# Altium PCB IR.PcbDoc
Units mm, origin at the board's own origin, x right, y up, seen from the top; angles counter-clockwise.
Board outline 31.95 x 23.94 mm, 2 copper layers (Top Layer, Bottom Layer); 11 components, 7 nets, 22 pads, 48 vias.
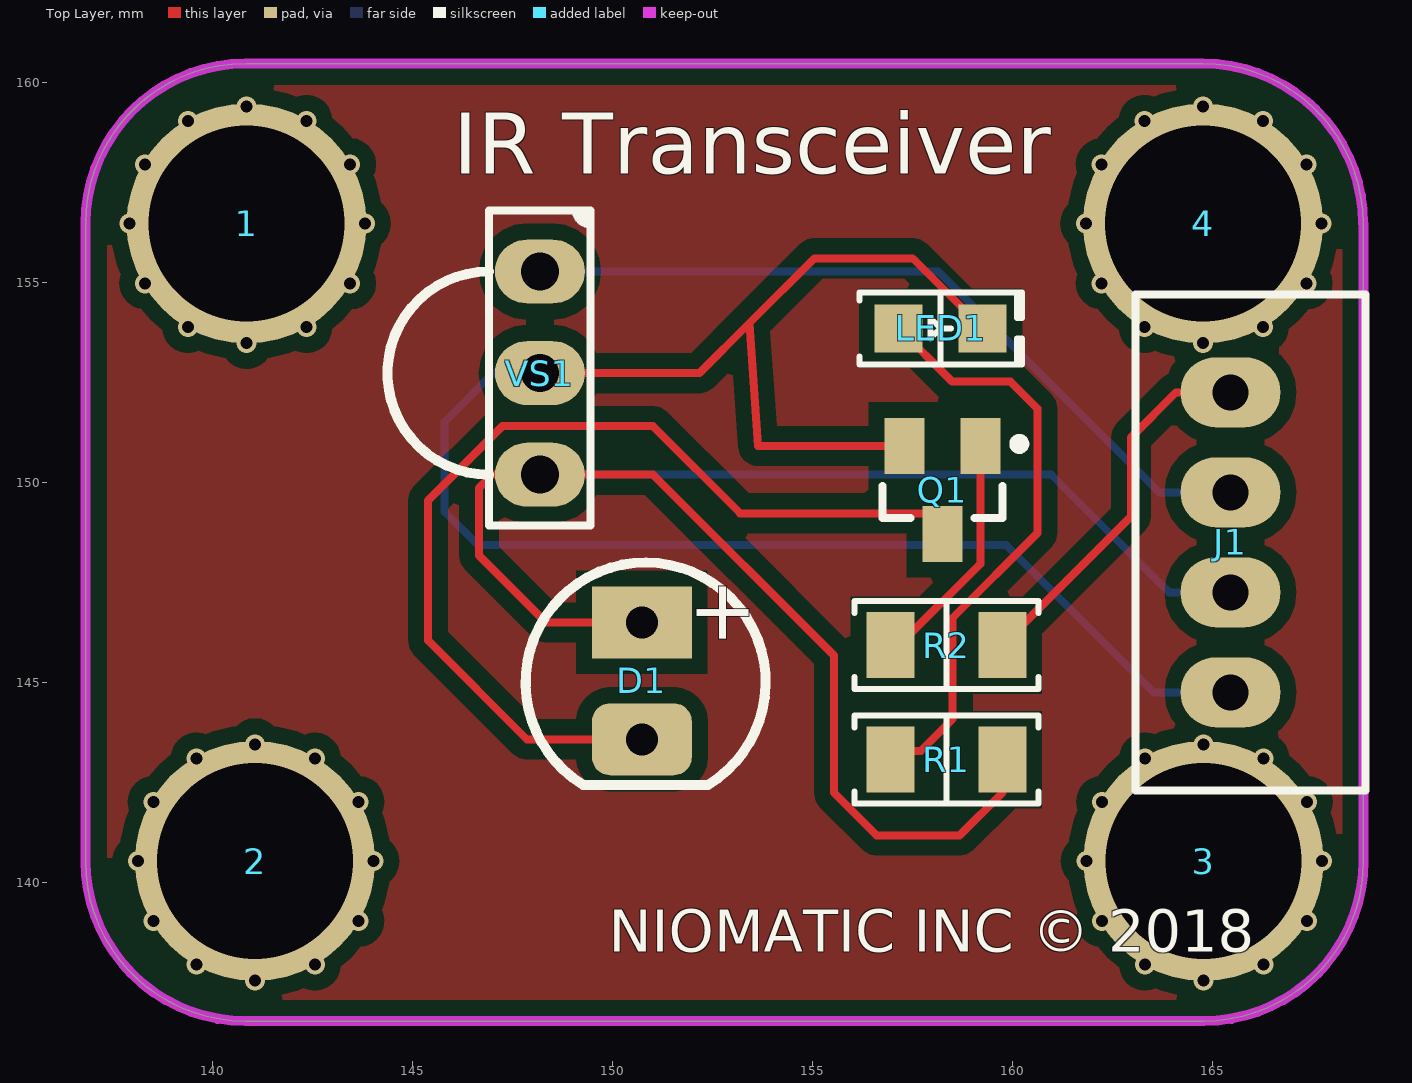
[diagram p0: Top Layer view]
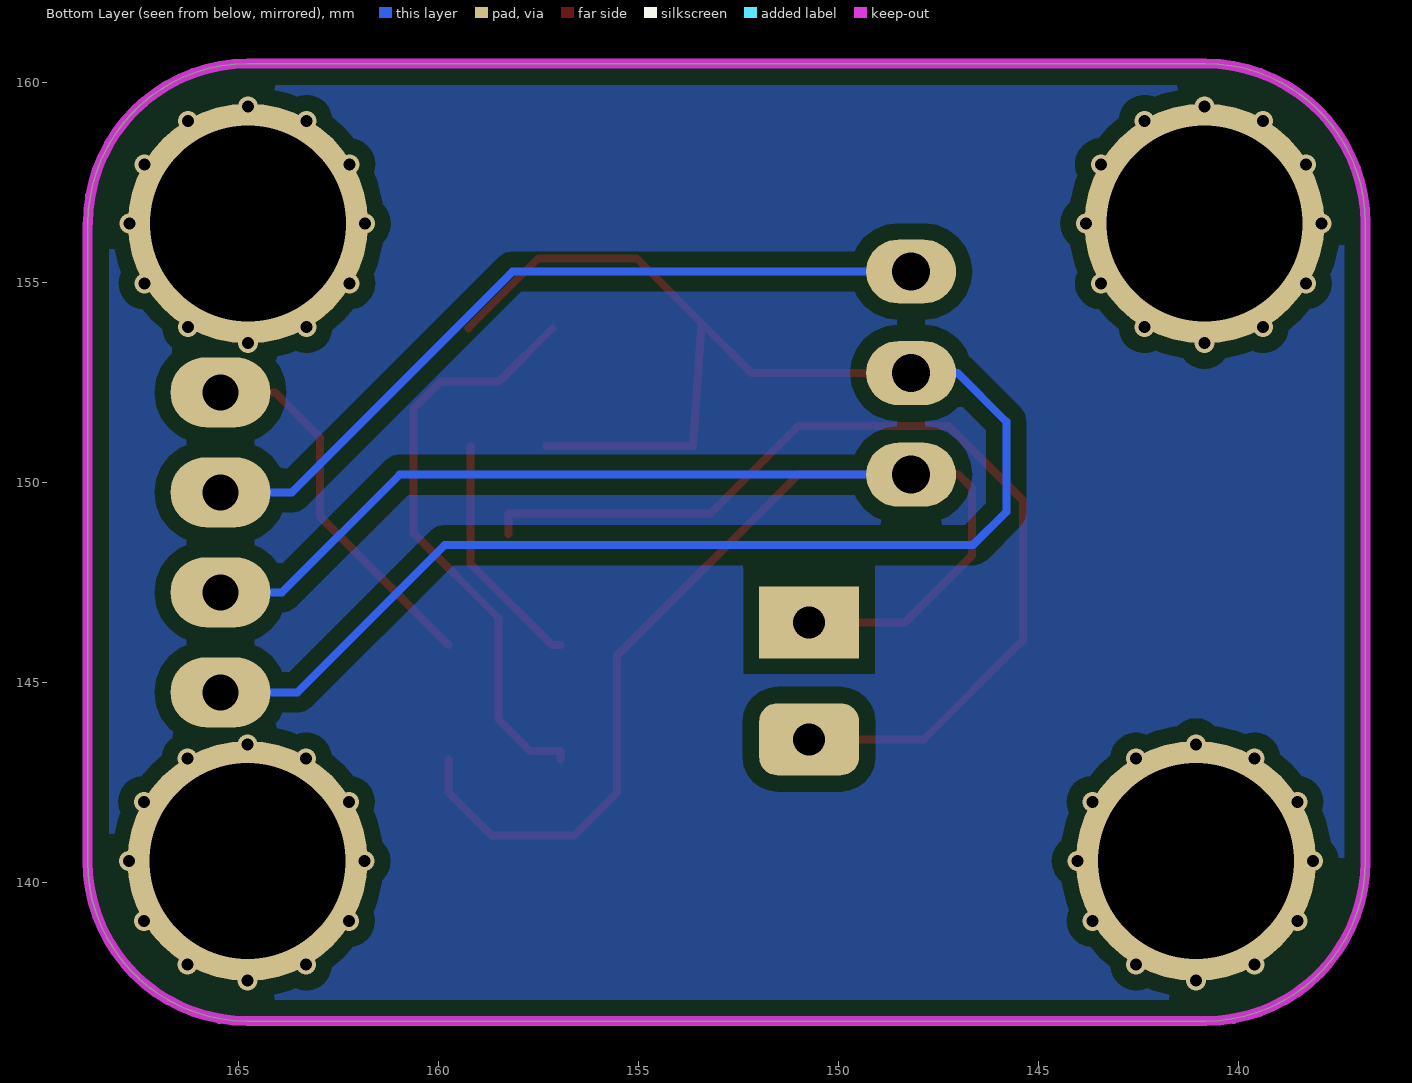
[diagram p1: Bottom Layer view, seen from below]
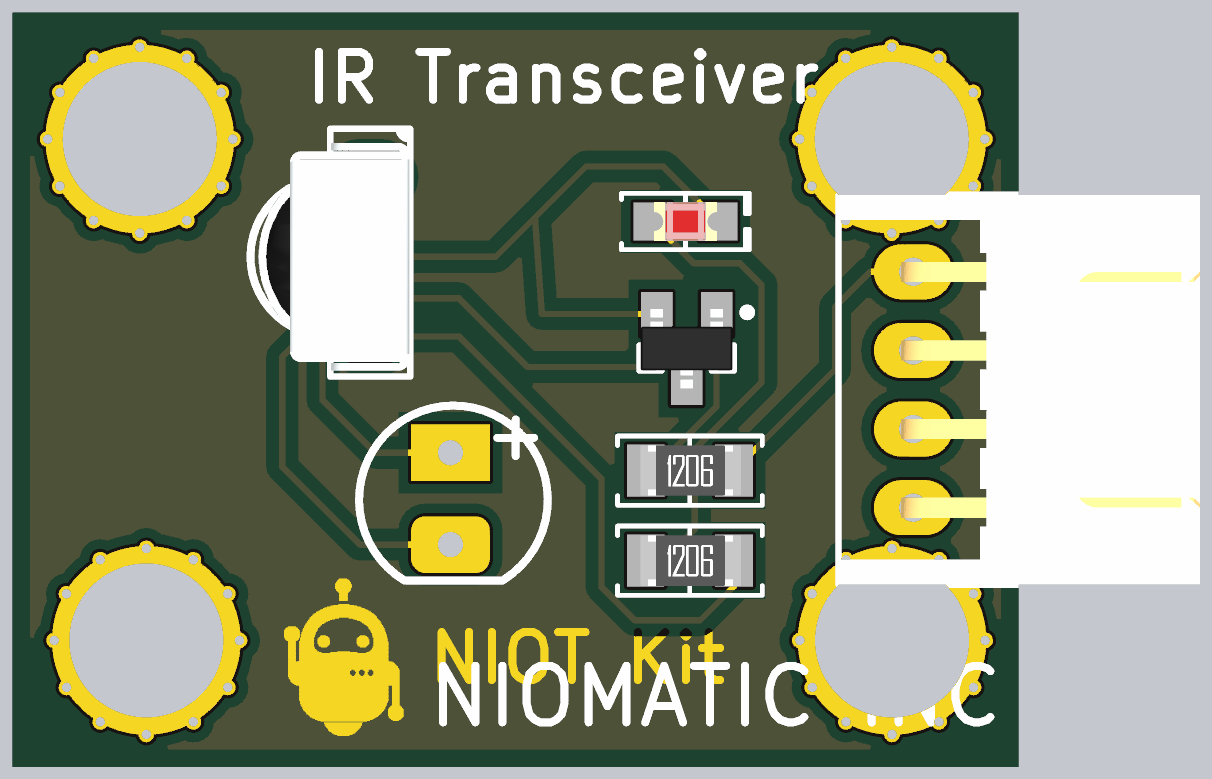
[diagram p2: 3D render of the assembled board from above, using the file's embedded part models]

## Layer stack, top to bottom
Top Solder: solder mask 0.0102, Solder Resist, Dk 3.5
Top Layer: signal copper 0.0356
Dielectric 1: dielectric 0.32, FR-4, Dk 4.8
Bottom Layer: signal copper 0.0356
Bottom Solder: solder mask 0.0102, Solder Resist, Dk 3.5

## Board outline
136.821,140.53 ccw(c140.821,140.53) 140.821,136.53 164.77,136.53 ccw(c164.77,140.53) 168.77,140.53 168.77,156.47 168.761,156.47 ccw(c164.761,156.47) 164.761,160.47 140.821,160.47 ccw(c140.821,156.47) 136.821,156.47 136.821,156.45

## Design rules (kind name [scope] priority, off if disabled: settings)
Clearance [All] p1: gap=0.4 ignorepadtopadclearanceinfootprint=FALSE
PolygonConnect [All] p1: connectstyle=Relief reliefconductorwidth=0.254 reliefentries=4 polygonreliefangle="90 Angle" airgapwidth=0.254
RoomDefinition IR [InComponentClass('IR')] p1: confinementstyle=ConfineIn formatcopy=TRUE lockcomponents=FALSE outline 178.943,26.924 198.247,26.924 198.247,44.577 178.943,44.577
RoutingVias [All] p1: holewidth=0.2 width=0.5 viastyle="Through Hole" minholewidth=0.2 minwidth=0.5 maxholewidth=0.2 maxwidth=0.5
SolderMaskExpansion [All] p1: expansion=0.102
Width [All] p1: maxlimit=0.2 minlimit=0.2 preferedwidth=0.2
30 further rules are at their usual default settings.

## Components (designator, comment, footprint, x,y, rotation, side; value= is the part's Value field where it differs from the comment)
1 "Lego" "Lego Hole" 140.85,156.47 r90 top
2 "Lego" "Lego Hole" 141.06,140.53 r90 top
3 "Lego" "Lego Hole" 164.771,140.53 r90 top
4 "Lego" "Lego Hole" 164.761,156.47 r90 top
D1 "LED 5mm" LED-1 150.73,145.1 r0 top
J1 "4 Pin" "JST XH B4B-XH-A - RIGHT" 165.445,148.5 r90 top
LED1 "RED" "LED 0805/2012 RED" 158.2,153.85 r0 top value=Green
Q1 "2N2222" SOT23 158.24,149.81 r270 top
R1 "1K" "RES 1206/3216" 158.342,143.067 r0 top
R2 "470R" "RES 1206/3216" 158.342,145.93 r0 top value=1K
VS1 "" VS1838 148.18,152.73 r270 top

## Footprints (in the part's own frame and the unit in brackets; to place one, negate y for a bottom-side part, rotate by r counter-clockwise, add the part's x,y. Pads: shape width x height; smd on the part's side, far side on the other; paste and mask are expansions set on the pad)
"JST XH B4B-XH-A - RIGHT" [mm]
  oval 1.75x2.5 hole 0.9: 1(-3.75,0) 2(-1.25,0) 3(1.25,0) 4(3.75,0)
  silkscreen extent -6.2,-3.38 6.2,2.38, body extent -6.2,-9.13 6.2,2.37, height 6.1
"LED 0805/2012 RED" [mm] "Chip Diode, 2-Leads, Body 2.00x1.25mm, IPC Medium Density"
  rect 1.2x1.2 smd: 1(-1.05,0) 2(1.05,0)
  silkscreen extent -2.03,-0.9 2.03,0.9, body extent -1,-0.62 1,0.63, height 0.9
LED-1 [mm] "LED; 2 Leads"
  rect 2.5x1.8 hole 0.8: 1(0,1.397)
  rrect50% 2.5x1.8 hole 0.8: 2(0,-1.524)
  silkscreen extent -2.91,-2.67 3.09,2.9
"Lego Hole" [mm]
  round 6 hole 4.9: 0(0,0)
"RES 1206/3216" [mm] "Chip Resistor, 2-Leads, Body 3.13x1.55mm, IPC Medium Density"
  rect 1.2x1.65 smd: 1(-1.4,0) 2(1.4,0)
  silkscreen extent -2.3,-1.1 2.3,1.1, body extent -1.57,-0.8 1.62,0.8, height 0.6
SOT23 [mm]
  rect 1.4x1 smd: B(-1.1,0.95) C(1.1,0) E(-1.1,-0.95)
  silkscreen extent -1.27,-1.5 0.7,2.05, body extent -1.27,-1.46 1.27,1.46, height 1
VS1838 [mm]
  oval 1.6x2.25 hole 0.95: 1(-2.54,0) 2(0,0) 3(2.54,0)
  silkscreen extent -4.07,-3.81 3.81,1.27, body extent -3.62,-3.56 3.62,1.24, height 12.8

## Part data
D1: "Typical LED", Designer="Seyed Mohsen Ghasemian", PackageDescription="LED; 2 Leads", PackageReference=LED, Published=07/31/2012, Publisher=www.picpars.com
LED1: library part LED, "Chip LED"
Q1: "NPN", De="Seyed Mohsen Ghasemian", E-mail=picpars@gmail.com, web=www.picpars.com
R1 R2: library part Resistor, "SMT Resistor"
VS1: library part VS1838, Manufacturer_Name=Honeywell, Manufacturer_Part_Number=SS49E-T3, Package=TO130P160X410X300-3P, Allied_Number=70238630, DeviceSetName=SS49E-T3, GateName_1=G$1, Height=1.6mm, LibraryName=SS49E-T3, RS_Part_Number=8749069, Supplier_Name=RS, SymbolName_1=SS49E-T3

## Via types
v1: diameter 0.5, hole 0.3, Top Layer to Bottom Layer, 48 vias

## Nets (pads, with @x,y where several pads share a name; then routed paths per layer and width w, separated by ;. In a path a pad name is that pad's centre, name@x,y a point inside that pad or via, vN(x,y) a via of type N, cw(c..) or ccw(c..) an arc to the next point about the centre after c; other vN are vias at no path point)
GND: J1.1 LED1.2 Q1.E VS1.2 | length 46.4
  Top Layer w0.2: VS1.2 152.171,152.73 153.416,153.975 ; Q1.E 153.636,150.91 153.416,153.975 ; LED1.2 157.5,155.6 155.042,155.6 153.416,153.975
  Bottom Layer w0.2: VS1.2 147.015,152.73 145.8,151.515 145.8,149.26 146.63,148.43 159.84,148.43 163.52,144.75 J1.1
IN: J1.3 VS1.1 | length 19.6
  Bottom Layer w0.2: VS1.1 158.141,155.27 163.661,149.75 J1.3
NetD1_2: D1.2 Q1.C | length 24.9
  Top Layer w0.2: D1.2 147.853,143.576 145.38,146.049 145.38,149.546 147.244,151.409 151.003,151.409 153.187,149.225 158.24,149.225 Q1.C
NetLED1_1: LED1.1 R1.1 | length 15
  Top Layer w0.2: R1.1 156.942,143.281 157.701,143.281 158.5,144.08 158.5,146.614 160.62,148.734 160.62,151.84 159.94,152.52 158.48,152.52 LED1.1
NetQ1_B: Q1.B R2.1 | length 6
  Top Layer w0.2: R2.1 157.161,145.93 159.19,147.959 Q1.B
OUT: J1.4 R2.2 | length 9.5
  Top Layer w0.2: R2.2 162.957,149.145 162.957,151.123 164.084,152.25 J1.4
VCC: D1.1 J1.2 R1.2 VS1.3 | length 45.2
  Top Layer w0.2: D1.1 148.336,146.497 146.66,148.173 146.66,149.86 146.99,150.19 151.01,150.19 155.53,145.67 155.53,142.24 156.6,141.17 158.672,141.17 159.742,142.24 R1.2
  Bottom Layer w0.2: VS1.3 160.966,150.19 163.906,147.25 J1.2
pads on no net: 1.0 2.0 3.0 4.0
copper on no net:
  other v1: 141.06,137.541 164.771,137.541 139.594,137.941 142.555,137.941 163.305,137.941 166.266,137.941 138.522,139.036 143.649,139.036 162.233,139.036 167.36,139.036 138.13,140.53 144.02,140.53 161.841,140.53 167.731,140.53 138.522,142.011 143.649,142.011 162.233,142.011 167.36,142.011 139.594,143.094 142.555,143.094 163.305,143.094 166.266,143.094 141.06,143.451 164.771,143.451 140.85,153.481 164.761,153.481 139.384,153.881 142.345,153.881 163.295,153.881 166.256,153.881 138.312,154.976 143.439,154.976 162.223,154.976 167.35,154.976 137.92,156.47 143.81,156.47 161.831,156.47 167.721,156.47 138.312,157.951 143.439,157.951 162.223,157.951 167.35,157.951 139.384,159.034 142.345,159.034 163.295,159.034 166.256,159.034 140.85,159.391 164.761,159.391

## Polygon pours and split planes (outlines as drawn)
no net on Top Layer "Top Layer-No Net" (solid, pour order 0): 136.821,140.53 ccw(c140.821,140.53) 140.821,136.53 164.77,136.53 ccw(c164.77,140.53) 168.77,140.53 168.77,156.47 168.761,156.47 ccw(c164.761,156.47) 164.761,160.47 140.821,160.47 ccw(c140.821,156.47) 136.821,156.47 136.821,156.45
no net on Bottom Layer "Top Layer-No Net1" (solid, pour order 1): 136.821,140.53 ccw(c140.821,140.53) 140.821,136.53 164.77,136.53 ccw(c164.77,140.53) 168.77,140.53 168.77,156.47 168.761,156.47 ccw(c164.761,156.47) 164.761,160.47 140.821,160.47 ccw(c140.821,156.47) 136.821,156.47 136.821,156.45

## Keep-outs
Keep-Out Layer:
  lines w0.254: 136.821,140.51 136.821,156.45 ; 136.821,140.53 ccw(c140.821,140.53) 140.821,136.53 164.77,136.53 ccw(c164.77,140.53) 168.77,140.53 168.77,156.47 ; 136.821,156.47 cw(c140.821,156.47) 140.821,160.47 164.761,160.47 cw(c164.761,156.47) 168.761,156.47

## Silkscreen, mask and mechanical layers (free items; w line width, h text height)
Top Overlay:
  text "IR Transceiver" at 146.02,157.71 h1.52
  text "NIOMATIC INC © 2018" at 149.9,137.91 h1.8
Top Solder:
  drawing of 381 lines, arcs and shapes, not listed
  text "NIOT Kit" at 149.92,139.26 h1.52

## Text inside footprints (layer, text, board x,y; h text height)
D1: Top Overlay "+" at 153.397,145.862 h1.52 r90